# Altium PCB Gateway.PcbDoc
Units mil, origin at the board's own origin, x right, y up, seen from the top; angles counter-clockwise.
Board outline 3560 x 2715 mil, 2 copper layers (Top Layer, Bottom Layer); 93 components, 69 nets, 319 pads, 83 vias.
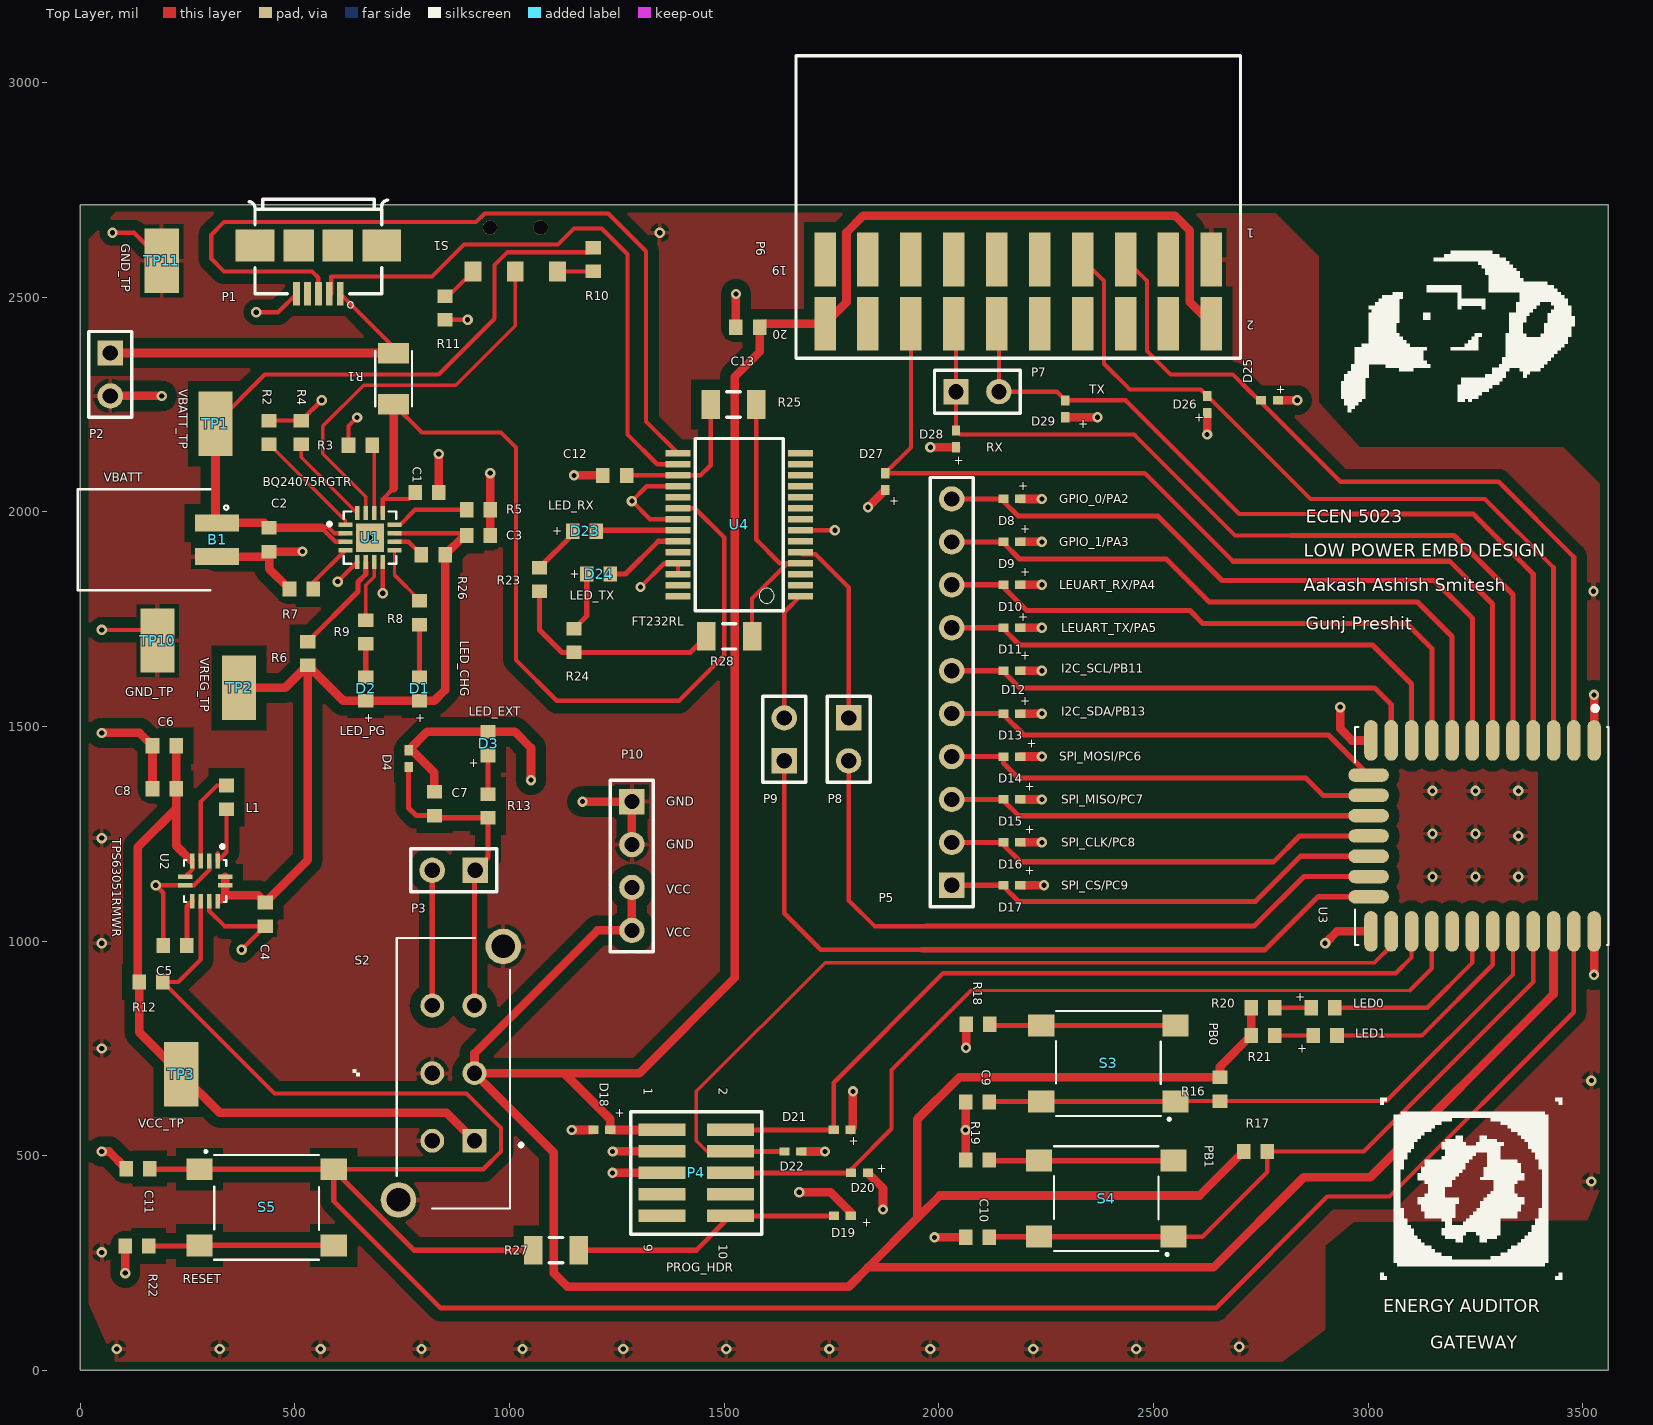
[diagram p0: Top Layer view]
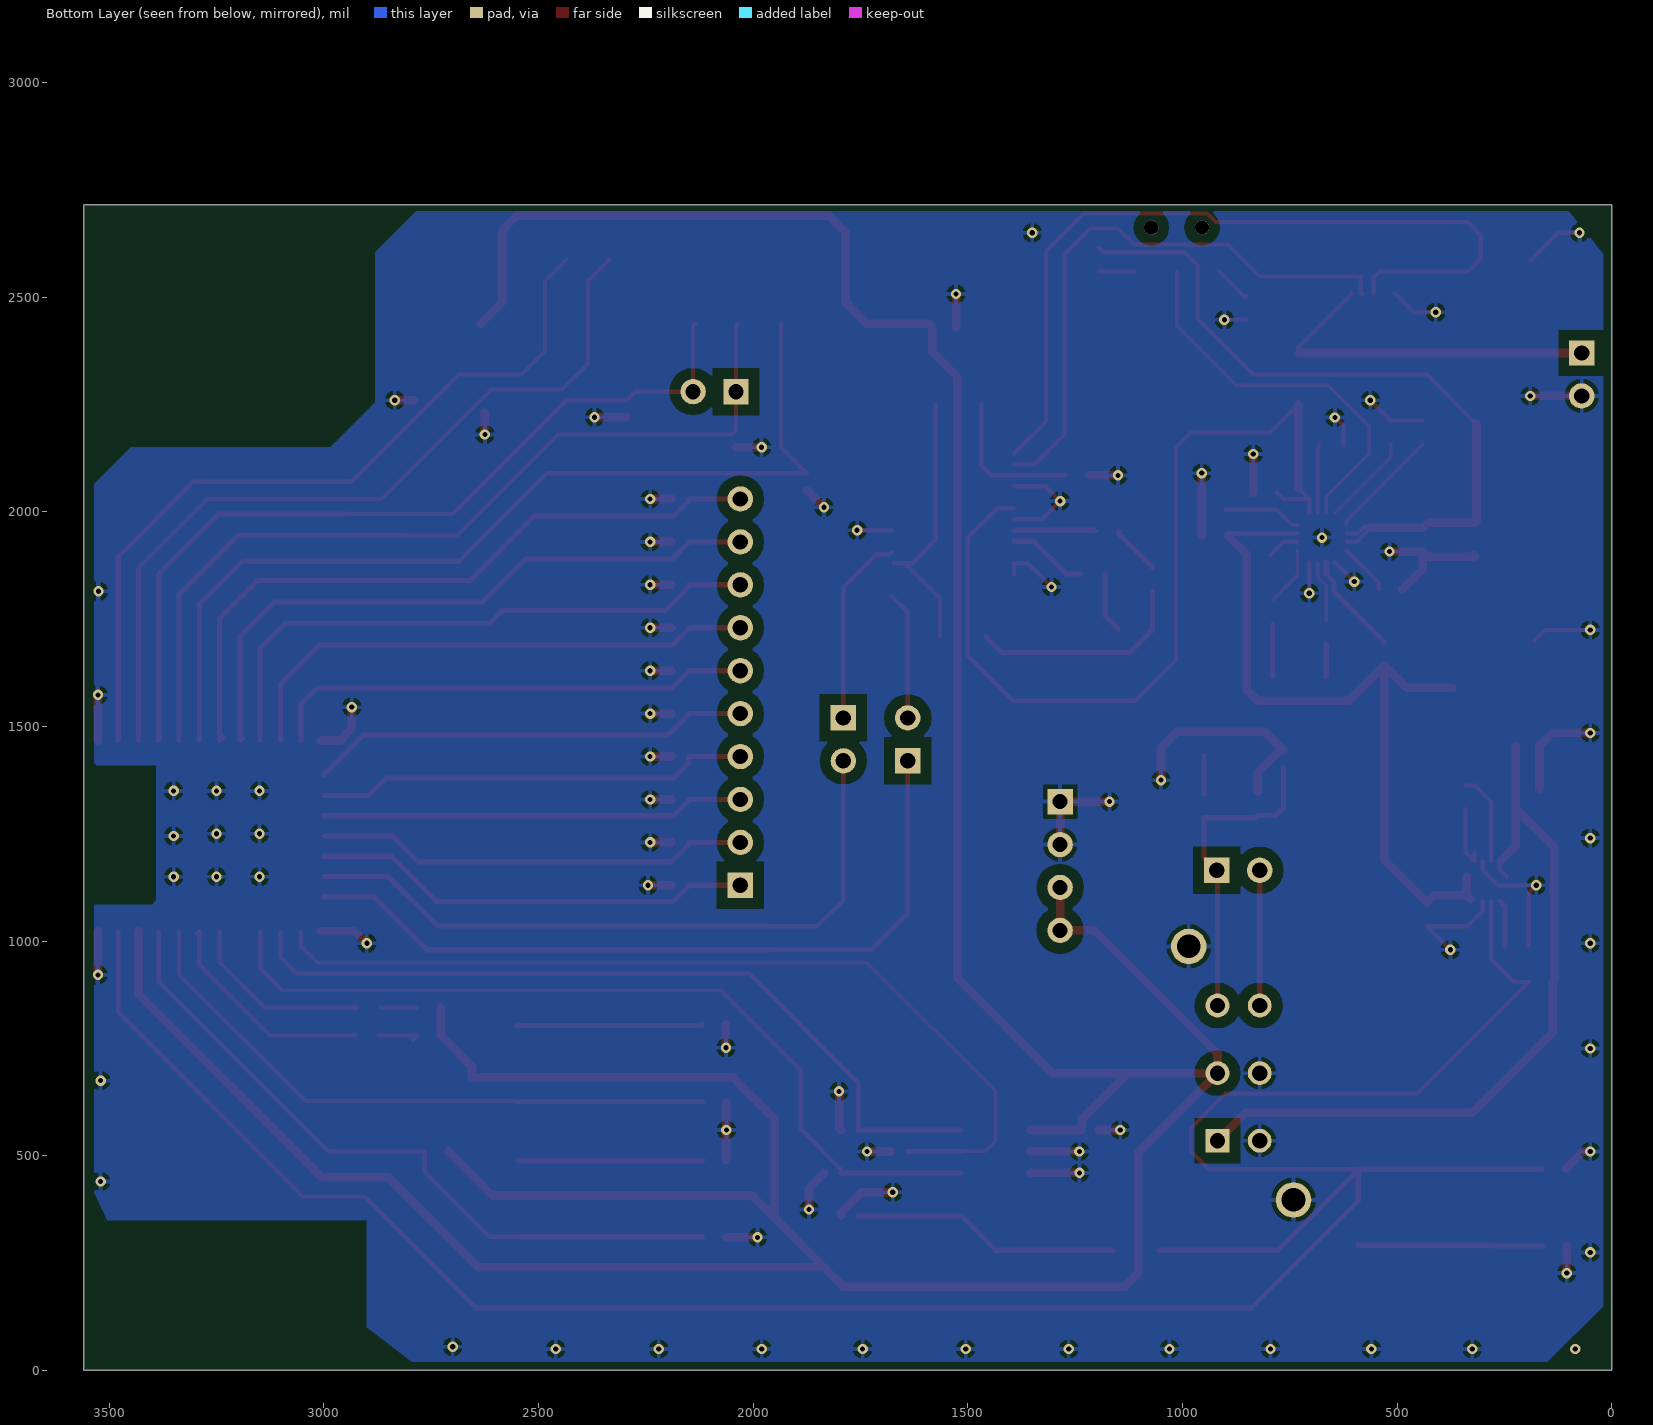
[diagram p1: Bottom Layer view, seen from below]

## Layer stack, top to bottom
Top Solder: solder mask 0.4, Solder Resist, Dk 3.5
Top Layer: signal copper 1.4
Dielectric 1: dielectric 12.6, FR-4, Dk 4.8
Bottom Layer: signal copper 1.4
Bottom Solder: solder mask 0.4, Solder Resist, Dk 3.5

## Board outline
0,0 3560,0 3560,2715 0,2715

## Design rules (kind name [scope] priority, off if disabled: settings)
Clearance [All] p1: gap=10 ignorepadtopadclearanceinfootprint=TRUE except(0: Arc-Hole Track-Hole SMDPad-Hole THPad-Hole Via-Hole Fill-Hole Poly-Hole Region-Hole Text-Hole; 8: Arc-SMDPad Track-Track Track-SMDPad SMDPad-SMDPad; 20: Arc-Via Track-Via SMDPad-Via THPad-Via Via-Via; 25: Arc-Poly Track-Poly SMDPad-Poly THPad-Poly Via-Poly Fill-Poly Poly-Poly)
PolygonConnect [All] p1: connectstyle=Relief reliefconductorwidth=10 reliefentries=4 polygonreliefangle="90 Angle" airgapwidth=10
RoutingVias [All] p1: holewidth=14 width=28 viastyle="Through Hole" minholewidth=10 minwidth=20 maxholewidth=12 maxwidth=24
SolderMaskExpansion [All] p1: expansion=4
Width Width_PWR [(InNet('GND') OR InNet('VREG') OR InNet('VREGOUT') OR InNet('VCC') OR InNet('VCC_IO') OR InNet('V_BATT') OR InNet('V_USB') OR InNet('V_RAW'))] p1: maxlimit=20 minlimit=10 preferedwidth=20
Width [All] p2: maxlimit=12 minlimit=8 preferedwidth=10
30 further rules are at their usual default settings.

## Classes and differential pairs
component class Gecko_IO: C9 C10 C13 D8 D9 D10 D11 D12 D13 D14 D15 D16 D17 D18 D19 D20 D21 D22 D25 D26 D27 D28 D29 LED0 LED1 P4 P5 P6 P10 R16 R17 R18 R19 R20 R21 R27 S3 S4
component class Gecko: C11 P7 R22 S5 TP11 U3
component class PMIC: B1 C1 C2 C3 D1 D2 P1 P2 R1 R2 R3 R4 R5 R6 R7 R8 R9 R10 R11 R26 S1 TP1 TP2 U1
component class Regulator: C4 C5 C6 C7 C8 D3 D4 L1 P3 R12 R13 S2 TP3 TP10 U2
component class UART_USB: C12 D23 D24 P8 P9 R23 R24 R25 R28 U4

## Components (designator, comment, footprint, x,y, rotation, side; value= is the part's Value field where it differs from the comment)
B1 "VBATT" S2B-PH-SM4-TB(LF)(SN) 240,1935 r0 top
C1 "CL10B105KP8NNNC" 1608[0603] 807.56,2045 r180 top value=1uF
C2 "CL10A226MPCNUBE" 1608[0603] 440,1935 r270 top value=22uF
C3 "CL10B105KP8NNNC" 1608[0603] 927.56,1945 r180 top value=1uF
C4 "CL10A226MPCNUBE" 1608[0603] 430.87,1062.44 r90 top value=22uF
C5 "C0603C132J3GAC7867" 1608[0603] 220.87,990 r0 top value=1.3nF
C6 "CL10A226MPCNUBE" 1608[0603] 195.87,1455 r0 top value=22uF
C7 "CL10B105KP8NNNC" 1608[0603] 825,1320 r270 top value=1uF
C8 "CL10A226MPCNUBE" 1608[0603] 195.87,1355 r0 top value=22uF
C9 "06035C102JAT2A" 1608[0603] 2090,625 r0 top value=1nF
C10 "06035C102JAT2A" 1608[0603] 2090,310 r0 top value=1nF
C11 "CL10F104ZO8NNNC" 1608[0603] 134.88,470 r180 top value=100nF
C12 "CL10F104ZO8NNNC" 1608[0603] 1245,2085 r180 top value=100nF
C13 "CL10A226MPCNUBE" 1608[0603] 1555,2430 r180 top value=22uF
D1 "LED_CHG" 1608[0603] 790,1587.44 r90 top
D2 "LED_PG" 1608[0603] 665,1587.44 r90 top
D3 "LED_EXT" 1608[0603] 950,1460 r90 top
D4 "CZRQR3V3B-HF" 0402 765,1425 r270 top
D8 "CZRQR3V3B-HF" 0402 2170,2030 r180 top
D9 "CZRQR3V3B-HF" 0402 2170,1930 r180 top
D10 "CZRQR3V3B-HF" 0402 2170,1830 r180 top
D11 "CZRQR3V3B-HF" 0402 2170,1730 r180 top
D12 "CZRQR3V3B-HF" 0402 2170,1630 r180 top
D13 "CZRQR3V3B-HF" 0402 2170,1530 r180 top
D14 "CZRQR3V3B-HF" 0402 2170,1430 r180 top
D15 "CZRQR3V3B-HF" 0402 2170,1330 r180 top
D16 "CZRQR3V3B-HF" 0402 2170,1230 r180 top
D17 "CZRQR3V3B-HF" 0402 2170,1130 r180 top
D18 "CZRQR3V3B-HF" 0402 1215,560.12 r0 top
D19 "CZRQR3V3B-HF" 0402 1775.32,360.12 r180 top
D20 "CZRQR3V3B-HF" 0402 1815,460 r180 top
D21 "CZRQR3V3B-HF" 0402 1660,510 r180 top
D22 "CZRQR3V3B-HF" 0402 1775,560.12 r180 top
D23 "LED_RX" 1608[0603] 1175,1955 r0 top
D24 "LED_TX" 1608[0603] 1207.56,1855 r0 top
D25 "CZRQR3V3B-HF" 0402 2770.32,2260 r180 top
D26 "CZRQR3V3B-HF" 0402 2625,2250.31 r90 top
D27 "CZRQR3V3B-HF" 0402 1875,2070.31 r90 top
D28 "CZRQR3V3B-HF" 0402 2040,2170 r90 top
D29 "CZRQR3V3B-HF" 0402 2295,2240 r90 top
L1 "LQM18PN1R5MFHD" 1608[0603] 340.87,1335 r270 top value=1.5uH
LED0 "LED0" 1608[0603] 2895,845 r0 top (schematic designator D6)
LED1 "LED1" 1608[0603] 2900,780 r0 top (schematic designator D7)
P1 "10104111-0001LF" FRAMATOME_10104111-0001LF 554.72,2620 r180 top
P2 "Manufacturer Part Number" HDR1X2 70,2370 r270 top
P3 "Manufacturer Part Number" HDR1X2 920,1165 r180 top
P4 "PROG_HDR" SAMTEC-FTSH-105-01-X-DV 1435,460.12 r270 top
P5 "Manufacturer Part Number" HDR1X10 2030,1130 r90 top
P6 "TSM-110-01-L-DH-A-P-TR" SAMTEC-TSM-110-01-X-DH 2185,2765 r180 top
P7 "Header 2" HDR1X2 2040,2280 r0 top
P8 "Header 2" HDR1X2 1790,1520 r270 top
P9 "Header 2" HDR1X2 1640,1420 r90 top
P10 "Header 4" HDR1X4 1285,1325 r270 top
R1 "PTC FUSE" RESC3216X125N 730,2310 r270 top
R2 "MCT06030C1002FP500" 1608[0603] 440,2185 r270 top value=10K
R3 "MCT0603MZ0000ZP500" 1608[0603] 652.44,2155 r0 top value=0R
R4 "ERJ-3EKF2201V" 1608[0603] 515,2185 r270 top value=2.2K
R5 "ERJ-3GEYJ332V" 1608[0603] 927.56,2005 r180 top value=3.3K
R6 "MCT06030C1002FP500" 1608[0603] 530,1670 r270 top value=10K
R7 "RG1608P-104-B-T5" 1608[0603] 515,1820 r0 top value=100K
R8 "MCT06030C1001FP500" 1608[0603] 790,1765 r270 top value=1K
R9 "ERJ-3GEYJ332V" 1608[0603] 665,1720 r270 top value=3.3K
R10 "RG1608P-104-B-T5" 1608[0603] 1195,2587.56 r90 top value=100K
R11 "MCT0603MZ0000ZP500" 1608[0603] 850,2475 r90 top value=0R
R12 "RG1608P-104-B-T5" 1608[0603] 165,905 r180 top value=100K
R13 "ERJ-3GEYJ332V" 1608[0603] 950,1315 r270 top value=3.3K
R16 "RC1608J105CS" 1608[0603] 2655,655 r90 top value=1M
R17 "RC1608J105CS" 1608[0603] 2737.56,510 r180 top value=1M
R18 "CRCW0603100RJNEAC" 1608[0603] 2091.02,806.42 r0 top value=100R
R19 "CRCW0603100RJNEAC" 1608[0603] 2090,490 r0 top value=100R
R20 "ERJ-3GEYJ332V" 1608[0603] 2755,845 r180 top value=3.3K
R21 "ERJ-3GEYJ332V" 1608[0603] 2755,780 r180 top value=3.3K
R22 "CRCW0603100RJNEAC" 1608[0603] 132.44,290 r0 top value=100
R23 "MCT06030C1001FP500" 1608[0603] 1070,1842.56 r270 top value=1K
R24 "MCT06030C1001FP500" 1608[0603] 1150,1700 r270 top value=1K
R25 "MCT0603MZ0000ZP500" C1206 1521.85,2250 r0 top value=0R
R26 "MCT0603MZ0000ZP500" 1608[0603] 822.44,1900 r180 top value=0R
R27 "MCT0603MZ0000ZP500" C1206 1108.15,280 r0 top value=0R
R28 "MCT0603MZ0000ZP500" C1206 1511.85,1710 r0 top value=0R
S1 "AYZ0102AGRLC" SW_AYZ0102AGRLC 1013.43,2611.18 r180 top
S2 "1825289-1" SW_1825289-1_1825289-1(Primary) 869.21,692.48 r90 top
S3 "PB0" 430182043816 2395,715 r180 top
S4 "PB1" 430182043816 2390,400 r180 top
S5 "RESET" 430182043816 434.21,380 r0 top
TP1 "VBATT_TP" TP380X203 315,2205 r270 top
TP2 "VREG_TP" TP380X203 370,1590 r270 top
TP3 "VCC_TP" TP380X203 235,690 r90 top
TP10 "GND_TP" TP380X203 180,1700 r90 top
TP11 "GND_TP" TP380X203 190,2585 r90 top
U1 "BQ24075RGTR" QFN50P300X300X100-17N 675,1940 r0 top
U2 "TPS63051RMWR" QFN50P250X250X100-12N 290.87,1140 r270 top
U3 "BGM13P22F512GA-V2" MODULE_BGM13P22F512GA-V2 3265,1245 r270 top
U4 "FT232RL" SOP65P780X200-28N 1535,1970 r180 top

## Footprints (in the part's own frame and the unit in brackets; to place one, negate y for a bottom-side part, rotate by r counter-clockwise, add the part's x,y. Pads: shape width x height; smd on the part's side, far side on the other; paste and mask are expansions set on the pad)
0402 [mm] "Chip Capacitor, Body 1.0x0.5mm, IPC High Density"
  rect 0.6x0.5 smd: 1(-0.5,0) 2(0.5,0)
  body extent -0.55,-0.3 0.55,0.3, height 1.3
1608[0603] [mm] "Chip Capacitor, Body 1.6x0.8mm, IPC High Density"
  rect 0.8x0.9 smd: 1(-0.7,0) 2(0.7,0)
  body extent -0.87,-0.48 0.87,0.48, height 1.3
430182043816 [mm]
  rect 1.55x1.3 smd: 1(-3.975,2.25) 2(-3.975,-2.25) 3(3.975,2.25) 4(3.975,-2.25)
  silkscreen extent -3.65,-3.1 3.1,3.35
C1206 [mm] "Chip Capacitor, Body 3.2x1.6mm, IPC High Density"
  rect 1.1x1.7 smd: 1(-1.35,0) 2(1.35,0)
  silkscreen extent -0.4,-0.75 0.4,0.75, body extent -1.7,-0.9 1.7,0.9, height 1.3
FRAMATOME_10104111-0001LF [mm]
  rect 0.4x1.4 smd: 1(-1.3,2.85) 2(-0.65,2.85) 3(0,2.85) 4(0.65,2.85) 5(1.3,2.85)
  rect 2.3x1.9 smd: 6(-3.75,0) 9(3.75,0)
  rect 1.8x1.9 smd: 7(-1.15,0) 8(1.15,0)
  silkscreen extent -4.1,-2.75 4.1,3.68
HDR1X2 [mm] "Connector; Header; 2 Position"
  rect 1.5x1.5 hole 0.9: 1(0,0)
  round 1.5 hole 0.9: 2(2.54,0)
  silkscreen extent -1.27,-1.27 3.81,1.27
HDR1X4 [mm] "Connector; Header; 4 Position"
  rect 1.5x1.5 hole 0.9: 1(0,0)
  round 1.5 hole 0.9: 2(2.54,0) 3(5.08,0) 4(7.62,0)
  silkscreen extent -1.27,-1.27 8.89,1.27
HDR1X10 [mm] "Connector; Header; 10 Position"
  rect 1.5x1.5 hole 0.9: 1(0,0)
  round 1.5 hole 0.9: 2(2.54,0) 3(5.08,0) 4(7.62,0) 5(10.16,0) 6(12.7,0) 7(15.24,0) 8(17.78,0) 9(20.32,0) 10(22.86,0)
  silkscreen extent -1.27,-1.27 24.13,1.27
MODULE_BGM13P22F512GA-V2 [mm]
  oval 2.4x0.8 smd: 1(-5.65,6.64) 2(-5.65,5.44) 3(-5.65,4.24) 4(-5.65,3.04) 5(-5.65,1.84) 6(-5.65,0.64) 7(-5.65,-0.56) 8(-5.65,-1.76) 9(-5.65,-2.96) 10(-5.65,-4.16) 11(-5.65,-5.36) 12(-5.65,-6.56) 20(5.65,-6.56) 21(5.65,-5.36) 22(5.65,-4.16) 23(5.65,-2.96) 24(5.65,-1.76) 25(5.65,-0.56) 26(5.65,0.64) 27(5.65,1.84) 28(5.65,3.04) 29(5.65,4.24) 30(5.65,5.44) 31(5.65,6.64)
  oval 0.8x2.4 smd: 13(-3.6,-6.7) 14(-2.4,-6.7) 15(-1.2,-6.7) 16(0,-6.7) 17(1.2,-6.7) 18(2.4,-6.7) 19(3.6,-6.7)
  silkscreen extent -7.69,-7.5 6.45,7.5
QFN50P250X250X100-12N [mm]
  rect 0.86x0.27 smd: 1(-1.185,0.75) 2(-1.185,0.25) 3(-1.185,-0.25) 4(-1.185,-0.75) 7(1.185,-0.75) 8(1.185,-0.25) 9(1.185,0.25) 10(1.185,0.75)
  rect 0.27x0.86 smd: 5(-0.25,-1.185) 6(0.25,-1.185) 11(0.25,1.185) 12(-0.25,1.185)
  silkscreen extent -2.14,-1.25 1.25,1.25
QFN50P300X300X100-17N [mm]
  rect 0.82x0.26 smd: 1(-1.45,0.75) 2(-1.45,0.25) 3(-1.45,-0.25) 4(-1.45,-0.75) 9(1.45,-0.75) 10(1.45,-0.25) 11(1.45,0.25) 12(1.45,0.75)
  rect 0.26x0.82 smd: 5(-0.75,-1.45) 6(-0.25,-1.45) 7(0.25,-1.45) 8(0.75,-1.45) 13(0.75,1.45) 14(0.25,1.45) 15(-0.25,1.45) 16(-0.75,1.45)
  rect 1.68x1.68 smd: 17(0,0)
  silkscreen extent -2.5,-1.55 1.55,1.55
RESC3216X125N [mm]
  rect 1.2x1.82 smd: 1(-1.505,0) 2(1.505,0)
  silkscreen extent -1.63,-1.09 1.63,1.09
S2B-PH-SM4-TB(LF)(SN) [mm]
  rect 2.6x1 smd: 1(2,1) 2(2,-1)
  silkscreen extent -6.25,-3 2.67,3
SAMTEC-FTSH-105-01-X-DV [mm]
  rect 0.74x2.79 smd: 1(-2.54,-2.032) 2(-2.54,2.032) 3(-1.27,-2.032) 4(-1.27,2.032) 5(0,-2.032) 6(0,2.032) 7(1.27,-2.032) 8(1.27,2.032) 9(2.54,-2.032) 10(2.54,2.032)
  silkscreen extent -3.63,-3.88 3.63,3.88
SAMTEC-TSM-110-01-X-DH [mm]
  rect 1.27x3.18 smd: 1(-11.43,4.496) 2(-11.43,8.306) 3(-8.89,4.496) 4(-8.89,8.306) 5(-6.35,4.496) 6(-6.35,8.306) 7(-3.81,4.496) 8(-3.81,8.306) 9(-1.27,4.496) 10(-1.27,8.306) 11(1.27,4.496) 12(1.27,8.306) 13(3.81,4.496) 14(3.81,8.306) 15(6.35,4.496) 16(6.35,8.306) 17(8.89,4.496) 18(8.89,8.306) 19(11.43,4.496) 20(11.43,8.306)
  silkscreen extent -13.15,-7.56 13.15,10.35
SOP65P780X200-28N [mm]
  rect 1.5x0.4 smd: 1(-3.625,4.225) 2(-3.625,3.575) 3(-3.625,2.925) 4(-3.625,2.275) 5(-3.625,1.625) 6(-3.625,0.975) 7(-3.625,0.325) 8(-3.625,-0.325) 9(-3.625,-0.975) 10(-3.625,-1.625) 11(-3.625,-2.275) 12(-3.625,-2.925) 13(-3.625,-3.575) 14(-3.625,-4.225) 15(3.625,-4.225) 16(3.625,-3.575) 17(3.625,-2.925) 18(3.625,-2.275) 19(3.625,-1.625) 20(3.625,-0.975) 21(3.625,-0.325) 22(3.625,0.325) 23(3.625,0.975) 24(3.625,1.625) 25(3.625,2.275) 26(3.625,2.925) 27(3.625,3.575) 28(3.625,4.225)
  silkscreen extent -2.6,-5.1 2.6,5.1
SW_1825289-1_1825289-1(Primary) [mm]
  rect 1.408x1.408 hole 0.9: 1(-4,-1.25)
  round 1.408 hole 0.9: 2(0,-1.25) 3(4,-1.25) 4(-4,1.25) 5(0,1.25) 6(4,1.25)
  round 2.1 hole 1.4: S1(-7.5,3.25) S2(7.5,-2.95)
  silkscreen extent -8,-4.1 8,3.35
SW_AYZ0102AGRLC [mm]
  rect 1x1.2 smd: 1(-2.5,1.3) 2(0,1.3) 3(2.5,1.3)
  round 0.85 hole 0.85 unplated: None(-1.5,-1.3) None(1.5,-1.3)
TP380X203 [mm]
  rect 3.8x2.03 smd: 1(0,0)

## Part data
B1: library part S2B-PH-SM4-TB(LF)(SN), "CONN HEADER PH SIDE 2POS 2MM SMD", Digi-Key Part Number=455-1749-1-ND, Manufacturer="JST Sales America Inc.", ComponentLink1Description="Digi-Key URL", ComponentLink1URL=https://www.digikey.com/products/en/connectors-interconnects/rectangular-connectors-headers-male-pins/314?k=S2B-PH-SM4-TB%28LF%29%28SN%29&k=&pkeyword=S2B-PH-SM4-TB%28LF%29%28SN%29&pv7=2&sf=0&quantity=&ColumnSort=0&page=1&pageSize=25, Manufacturer Part Number=S2B-PH-SM4-TB(LF)(SN)
C1 C3 C7: library part "Cap Semi", "CAP CER 1UF 10V X7R 0603", Digi-Key Part Number=1276-1946-1-ND, Manufacturer="Samsung Electro-Mechanics", ComponentLink1Description="Digi-Key Link", ComponentLink1URL=https://www.digikey.com/product-detail/en/samsung-electro-mechanics/CL10B105KP8NNNC/1276-1946-1-ND/3890032, Manufacturer Part Number=CL10B105KP8NNNC
C2 C4 C6 C8 C13: library part Cap, "CAP CER 22UF 10V X5R 0603", Digi-Key Part Number=1276-6504-1-ND, Manufacturer="Samsung Electro-Mechanics", ComponentLink1Description="Digi-Key Link", ComponentLink1URL=https://www.digikey.com/product-detail/en/samsung-electro-mechanics/CL10A226MPCNUBE/1276-6504-1-ND/5961363, LatestRevisionDate=17-Jul-2002, LatestRevisionNote="Re-released for DXP Platform.", Manufacturer Part Number=CL10A226MPCNUBE, PackageDescription="Radial Cap, Thru-Hole; 2 Leads; 0.3 in Pin Spacing", PackageReference=RAD-0.3, Published=8-Jun-2000, Publisher="Altium Limited"
C5: library part Cap, "CAP CER 1300PF 25V C0G/NP0 0603", Digi-Key Part Number=399-14953-1-ND, Manufacturer=KEMET, ComponentLink1Description="Digi-Key Link", ComponentLink1URL=https://www.digikey.com/product-detail/en/kemet/C0603C132J3GAC7867/399-14953-1-ND/7382502, LatestRevisionDate=17-Jul-2002, LatestRevisionNote="Re-released for DXP Platform.", Manufacturer Part Number=C0603C132J3GAC7867, PackageDescription="Radial Cap, Thru-Hole; 2 Leads; 0.3 in Pin Spacing", PackageReference=RAD-0.3, Published=8-Jun-2000, Publisher="Altium Limited"
C9 C10: library part Cap, "CAP CER 1000PF 50V X7R 0603", Digi-Key Part Number=478-5006-1-ND, Manufacturer="AVX Corporation", ComponentLink1Description="Digi-Key Link", ComponentLink1URL=https://www.digikey.com/product-detail/en/avx-corporation/06035C102JAT2A/478-5006-1-ND/1888217, LatestRevisionDate=17-Jul-2002, LatestRevisionNote="Re-released for DXP Platform.", Manufacturer Part Number=06035C102JAT2A, PackageDescription="Radial Cap, Thru-Hole; 2 Leads; 0.3 in Pin Spacing", PackageReference=RAD-0.3, Published=8-Jun-2000, Publisher="Altium Limited"
C11 C12: library part Cap, "CAP CER 0.1UF 16V X7R 0603", Digi-Key Part Number=1276-1258-1-ND, Manufacturer="Samsung Electro-Mechanics", ComponentLink1Description="Digi-Key Link", ComponentLink1URL=https://www.digikey.com/product-detail/en/samsung-electro-mechanics/CL10F104ZO8NNNC/1276-1258-1-ND/3889344, LatestRevisionDate=17-Jul-2002, LatestRevisionNote="Re-released for DXP Platform.", Manufacturer Part Number=CL10F104ZO8NNNC, PackageDescription="Radial Cap, Thru-Hole; 2 Leads; 0.3 in Pin Spacing", PackageReference=RAD-0.3, Published=8-Jun-2000, Publisher="Altium Limited"
D1: library part LED2, "Blue 470nm LED Indication - Discrete 2.85V 0603 (1608 Metric)", Digi-Key Part Number=475-2816-1-ND, Manufacturer="OSRAM Opto Semiconductors Inc.", Manufacturer Part Number="LB Q39G-L2OO-35-1", ComponentLink1Description="Digi-Key Link", ComponentLink1URL=https://www.digikey.com/product-detail/en/osram-opto-semiconductors-inc/LB-Q39G-L2OO-35-1/475-2816-1-ND/2176355
D2 D3 LED0 LED1: library part LED2, "LED GREEN DIFFUSED 0603 SMD", Digi-Key Part Number=475-3118-1-ND, Manufacturer="OSRAM Opto Semiconductors Inc.", Manufacturer Part Number="LG L29K-F2J1-24-Z", ComponentLink1Description="Digi-Key Link", ComponentLink1URL=https://www.digikey.com/product-detail/en/osram-opto-semiconductors-inc/LG-L29K-F2J1-24-Z/475-3118-1-ND/4899549
D4 D8 D9 D10 D11 D12 D13 D14 D15 D16 D17 D18 D19 D20 D21 D22 D25 D26 D27 D28 D29: library part "D Zener", "DIODE ZENER 3.3V 125MW 0402", Digi-Key Part Number=641-1682-1-ND, Manufacturer="Comchip Technology", ComponentLink1Description="Digi-Key Link", ComponentLink1URL=https://www.digikey.com/product-detail/en/comchip-technology/CZRQR3V3B-HF/641-1682-1-ND/5147319, Manufacturer Part Number=CZRQR3V3B-HF
D23: library part LED2, "LED RED DIFFUSED 0603 SMD", Digi-Key Part Number=475-1195-1-ND, Manufacturer="OSRAM Opto Semiconductors Inc.", Manufacturer Part Number="LS L29K-H1J2-1-Z", ComponentLink1Description="Digi-Key Link", ComponentLink1URL=https://www.digikey.com/product-detail/en/osram-opto-semiconductors-inc/LG-L29K-F2J1-24-Z/475-3118-1-ND/4899549
D24: library part LED2, "LED YELLOW DIFFUSED 0603 SMD", Digi-Key Part Number=475-1196-1-ND, Manufacturer="OSRAM Opto Semiconductors Inc.", Manufacturer Part Number="LY L29K-H1K2-26-Z", ComponentLink1Description="Digi-Key Link", ComponentLink1URL=https://www.digikey.com/product-detail/en/osram-opto-semiconductors-inc/LY-L29K-H1K2-26-Z/475-1196-1-ND/810357
L1: library part Inductor, "FIXED IND 1.5UH 1.1A 213 MOHM", Digi-Key Part Number=490-15637-1-ND, Manufacturer="Murata Electronics North America", Code_IEC=1005, Code_JEITA=0402, ComponentLink1Description="Digi-Key Link", ComponentLink1URL=https://www.digikey.com/product-detail/en/murata-electronics-north-america/LQM18PN1R5MFHD/490-15637-1-ND/6800302, LatestRevisionDate=29-May-2009, LatestRevisionNote="IPC-7351 Footprint Added.", Manufacturer Part Number=LQM18PN1R5MFHD, PackageDescription="Chip Inductor", PackageReference=0402-A, Published=8-Jun-2000, Publisher="Altium Limited"
P1: "Micro Usb, 2.0 Type Ab, Receptacle, Th", Digi-Key Part Number=609-4053-1-ND, Manufacturer="Amphenol FCI", ComponentLink1Description="Digi-Key Link", ComponentLink1URL=https://www.digikey.com/product-detail/en/amphenol-fci/10104111-0001LF/609-4053-1-ND/2350359?utm_source=snapeda&utm_medium=aggregator&utm_campaign=symbol, Manufacturer Part Number=10104111-0001LF
P2 P3: library part "Header 2", "Header, 2-Pin"
  P3: LatestRevisionDate=17-Jul-2002, LatestRevisionNote="Re-released for DXP Platform.", Publisher="Altium Limited"
P4: library part SAMTEC-FTSH-105-01-X-DV, ".050\" X .050 TERMINAL STRIP", Digi-Key Part Number=SAM13160CT-ND, Manufacturer=Samtec, Manufacturer Part Number=FTSH-105-01-F-DV-K-TR, ComponentLink1Description="Digi-Key Link", ComponentLink1URL=https://www.digikey.com/products/en/connectors-interconnects/rectangular-connectors-headers-male-pins/314?k=FTSH-105-01-F-DV-K-TR&k=&pkeyword=FTSH-105-01-F-DV-K-TR&pv7=2&sf=0&quantity=&ColumnSort=0&page=1&pageSize=25
P5: library part "Header 10", "Header, 10-Pin", LatestRevisionDate=17-Jul-2002, LatestRevisionNote="Re-released for DXP Platform.", Publisher="Altium Limited"
P6: library part SAMTEC-TSM-110-01-X-DH, ".025 SQ. TERMINAL STRIPS", Digi-Key Part Number=SAM14883CT-ND, Manufacturer="Samtec Inc.", ComponentLink1Description="Digi-Key Link", ComponentLink1URL=https://www.digikey.com/product-detail/en/samtec-inc/TSM-110-01-L-DH-A-P-TR/SAM14883CT-ND/9595175, Manufacturer Part Number=TSM-110-01-L-DH-A-P-TR
P7 P8 P9: "Header, 2-Pin", LatestRevisionDate=17-Jul-2002, LatestRevisionNote="Re-released for DXP Platform.", Publisher="Altium Limited"
P10: "Header, 4-Pin", LatestRevisionDate=17-Jul-2002, LatestRevisionNote="Re-released for DXP Platform.", Publisher="Altium Limited"
R1: library part 0ZCA0075FF2G, "PTC RESET FUSE 6V 500MA 1206", Digi-Key Part Number=F2112CT-ND, Manufacturer="Bel Fuse", Manufacturer Part Number="Littelfuse Inc.", Package="1206 Bel Fuse", Availability=Available, ComponentLink1Description="Digi-Key Link", ComponentLink1URL=https://www.digikey.com/product-detail/en/littelfuse-inc/1206L050YR/F2112CT-ND/455721, MP=0ZCA0075FF2G, Price=None, SnapEDA_Link=https://www.snapeda.com/parts/0ZCA0075FF2G/Bel%20Fuse%20Inc./view-part/?ref=snap
R2 R6: library part Res3, "RES SMD 10K OHM 1% 1/8W 0603", Digi-Key Part Number=MCT0603-10.0K-CFCT-ND, Manufacturer="Vishay Beyschlag", ComponentLink1Description="Digi-Key URL", ComponentLink1URL=https://www.digikey.com/products/en?keywords=MCT0603-10.0K-CFCT-ND, Manufacturer Part Number=MCT06030C1002FP500
R3 R11 R25 R26 R27 R28: library part Res3, "RES 0 OHM JUMPER 1/8W 0603", Digi-Key Part Number=749-1745-1-ND, Manufacturer="Vishay Beyschlag", ComponentLink1URL=https://www.digikey.com/product-detail/en/vishay-beyschlag/MCT0603MZ0000ZP500/749-1745-1-ND/7348053, Manufacturer Part Number=MCT0603MZ0000ZP500
  R3 R26 R27: ComponentLink1Description="Digi-Key Link", LatestRevisionDate=29-May-2009, LatestRevisionNote="IPC-7351 Footprint Added.", PackageDescription="Chip Resistor", PackageReference=J1-0603, Published=8-Jun-2000, Publisher="Altium Limited"
  R11: ComponentLink2Description="Digi-Key Link", LatestRevisionDate=29-May-2009, LatestRevisionNote="IPC-7351 Footprint Added.", PackageDescription="Chip Resistor", PackageReference=J1-0603, Published=8-Jun-2000, Publisher="Altium Limited"
  R25 R28: ComponentLink1Description="Digi-Key Link"
R4: library part Res3, "RES SMD 2.2K OHM 1% 1/10W 0603", Digi-Key Part Number=P2.20KHCT-ND, Manufacturer="Panasonic Electronic Components", ComponentLink1Description="Digi-Key URL", ComponentLink1URL=https://www.digikey.com/product-detail/en/panasonic-electronic-components/ERJ-3EKF2201V/P2.20KHCT-ND/1746742, Manufacturer Part Number=ERJ-3EKF2201V
R5 R9 R13 R20 R21: library part Res3, "RES SMD 3.3K OHM 5% 1/10W 0603", Digi-Key Part Number=P3.3KGCT-ND, Manufacturer="Panasonic Electronic Components", ComponentLink1Description="Digi-Key URL", ComponentLink1URL=https://www.digikey.com/product-detail/en/panasonic-electronic-components/ERJ-3GEYJ332V/P3.3KGCT-ND/135146, Manufacturer Part Number=ERJ-3GEYJ332V
R7 R10 R12: library part Res3, "RES SMD 100K OHM 0.1% 1/10W 0603", Digi-Key Part Number=RG16P100KBCT-ND, Manufacturer=Susumu, Manufacturer Part Number=RG1608P-104-B-T5
  R7 R10: ComponentLink1Description="Digi-Key URL", ComponentLink1URL=https://www.digikey.com/products/en?keywords=RG16p100kbct-nd
  R12: ComponentLink1Description="Digi-Key Link", ComponentLink1URL=https://www.digikey.com/products/en/resistors/chip-resistor-surface-mount/52?k=RG1608P-104-B-T5&k=&pkeyword=RG1608P-104-B-T5&pv7=2&sf=0&quantity=&ColumnSort=0&page=1&pageSize=25, LatestRevisionDate=29-May-2009, LatestRevisionNote="IPC-7351 Footprint Added.", PackageDescription="Chip Resistor", PackageReference=J1-0603, Published=8-Jun-2000, Publisher="Altium Limited"
R8 R23 R24: library part Res3, "RES SMD 1K OHM 1% 1/8W 0603", Digi-Key Part Number=MCT0603-1.00K-CFCT-ND, Manufacturer="Vishay Beyschlag", ComponentLink1Description="Digi-Key URL", ComponentLink1URL=https://www.digikey.com/product-detail/en/vishay-beyschlag/MCT06030C1001FP500/MCT0603-1.00K-CFCT-ND/2607875, Manufacturer Part Number=MCT06030C1001FP500
R16 R17: library part Res3, "RES SMD 1M OHM 5% 1/10W 0603", Digi-Key Part Number=1276-5134-1-ND, Manufacturer="Samsung Electro-Mechanics", ComponentLink1Description="Digi-Key Link", ComponentLink1URL=https://www.digikey.com/product-detail/en/samsung-electro-mechanics/RC1608J105CS/1276-5134-1-ND/3968106, LatestRevisionDate=29-May-2009, LatestRevisionNote="IPC-7351 Footprint Added.", Manufacturer Part Number=RC1608J105CS, PackageDescription="Chip Resistor", PackageReference=J1-0603, Published=8-Jun-2000, Publisher="Altium Limited"
R18 R19 R22: library part Res3, "RES SMD 100 OHM 5% 1/10W 0603", Digi-Key Part Number=541-4059-1-ND, Manufacturer="Vishay Dale", ComponentLink1Description="Digi-Key Link", ComponentLink1URL=https://www.digikey.com/product-detail/en/vishay-dale/CRCW0603100RJNEAC/541-4059-1-ND/7928742, LatestRevisionDate=29-May-2009, LatestRevisionNote="IPC-7351 Footprint Added.", Manufacturer Part Number=CRCW0603100RJNEAC, PackageDescription="Chip Resistor", PackageReference=J1-0603, Published=8-Jun-2000, Publisher="Altium Limited"
S1: "SWITCH SLIDE SPDT 100MA 12V", Digi-Key Part Number=401-2012-1-ND, Manufacturer=C&K, ComponentLink1Description="Digi-Key Link", ComponentLink1URL=https://www.digikey.com/products/en/switches/slide-switches/213?k=AYZ0102AGRLC&k=&pkeyword=AYZ0102AGRLC&pv7=2&sf=0&quantity=&ColumnSort=0&page=1&pageSize=25, Manufacturer Part Number=AYZ0102AGRLC
S2: "MHS22204=DPDT SL SW VERT AG", Digi-Key Part Number=450-1572-ND, Manufacturer="TE Connectivity", ComponentLink1Description="Digi-Key Link", ComponentLink1URL=https://www.digikey.com/products/en?keywords=MHS22204, Manufacturer Part Number=1825289-1
S3 S4 S5: library part 430182043816, "SWITCH TACTILE SPST-NO 0.05A 12V", Digi-Key Part Number=732-7004-1-ND, Manufacturer="Wurth Electronics", ComponentLink1Description="Digi-Key Link", ComponentLink1URL=https://www.digikey.com/products/en/switches/tactile-switches/197?k=430+182+043+816&k=&pkeyword=430+182+043+816&pv7=2&sf=0&quantity=&ColumnSort=0&page=1&pageSize=25, Manufacturer Part Number=430182043816
TP1 TP2 TP3 TP10 TP11: library part 5019, "PC TEST POINT MINIATURE", Digi-Key Part Number=36-5019CT-ND, Manufacturer="Keystone Electronics", Package="2010 Keystone", ComponentLink1Description="Digi-Key Link", ComponentLink1URL=https://www.digikey.com/product-detail/en/keystone-electronics/5019/36-5019CT-ND/3907344?utm_source=snapeda&utm_medium=aggregator&utm_campaign=symbol, Digi-Key_Part_Number=36-5019CT-ND, Manufacturer Part Number=5019, MF=Keystone, MP=5019, SnapEDA_Link=https://www.snapeda.com/parts/5019/Keystone%20Electronics/view-part/?ref=snap
  TP11: Digi-Key_Purchase_URL=https://www.digikey.com/product-detail/en/keystone-electronics/5019/36-5019CT-ND/3907344?utm_source=snapeda&utm_medium=aggregator&utm_campaign=symbol
U1: library part BQ24075RGTT, "IC LI-ION CHARGE MGMT 16-QFN", Digi-Key Part Number=296-38874-1-ND, Manufacturer="Texas Instruments", Package="QFN-16 Texas Instruments", Availability=Available, ComponentLink1Description="Digi Key Link", ComponentLink1URL=https://www.digikey.com/product-detail/en/texas-instruments/BQ24075RGTR/296-38874-1-ND/5142986, Manufacturer Part Number=BQ24075RGTT, Price=None, SnapEDA_Link=https://www.snapeda.com/parts/BQ24075RGTT/Texas%20Instruments/view-part/?ref=snap
U2: "Tiny Single Inductor Buck Boost Converter 12-VQFN -40 to 85", Digi-Key Part Number=296-42650-1-ND, Manufacturer="Texas Instruments", ComponentLink1Description="Digi-Key Link", ComponentLink1URL=https://www.digikey.com/products/en/integrated-circuits-ics/pmic-voltage-regulators-dc-dc-switching-regulators/739?k=TPS63051RMWR&k=&pkeyword=TPS63051RMWR&pv7=2&sf=0&quantity=&ColumnSort=0&page=1&pageSize=25, Manufacturer Part Number=TPS63051RMWR
U3: "EFR32BG13 Bluetooth 5.0 Module, 512kB Flash, +8dbm", Digi-Key Part Number=336-5465-1-ND, Manufacturer="Silicon Labs", Package="Module Silicon Labs", Availability=Available, ComponentLink1Description="Digi-Key Link", ComponentLink1URL=https://www.digikey.com/product-detail/en/silicon-labs/BGM13P32F512GA-V2R/336-5465-1-ND/9324917, Manufacturer Part Number=BGM13P22F512GA-V2, Price=None, SnapEDA_Link=https://www.snapeda.com/parts/BGM13P22F512GA-V2/Silicon%20Labs/view-part/?ref=snap
U4: library part FT232RL-REEL, "USB Bridge, USB to UART USB 2.0 UART Interface 28-SSOP", Digi-Key Part Number=768-1007-1-ND, Manufacturer="FTDI, Future Technology Devices International Ltd", Package="SSOP-28 FTDI", Availability=Available, ComponentLink1Description="Digi-Key Link", ComponentLink1URL=https://www.digikey.com/product-detail/en/ftdi-future-technology-devices-international-ltd/FT232RL-REEL/768-1007-1-ND/1836402, Manufacturer Part Number=FT232RL-REEL, MF=FTDI,, MP=FT232RL-REEL, Price=None, SnapEDA_Link=https://www.snapeda.com/parts/FT232RL-REEL/FTDI%2C%20Future%20Technology%20Devices%20International%20Ltd/view-part/?ref=snap

## Via types
v1: diameter 24, hole 12, Top Layer to Bottom Layer, tented top, 83 vias

## Nets (pads, with @x,y where several pads share a name; then routed paths per layer and width w, separated by ;. In a path a pad name is that pad's centre, name@x,y a point inside that pad or via, vN(x,y) a via of type N, cw(c..) or ccw(c..) an arc to the next point about the centre after c; other vN are vias at no path point)
DEBUG_GPIO0: D8.2 P5.10 U3.7 | length 1627.1
  Top Layer w12: P5.10 D8.2 2150.31,2024.69 2185,1990 2510,1990 2660,1840 3155,1840 3242.95,1752.05 U3.7 U3.7@3235,1475.39
DEBUG_GPIO1: D9.2 P5.9 U3.8 | length 1508.3
  Top Layer w12: P5.9 D9.2 2150.31,1927.92 2188.23,1890 2530,1890 2630,1790 3115,1790 3195.71,1709.29 U3.8 U3.8@3190,1473.15
GND: B1.2 C1.1 C2.2 C3.1 C4.1 C5.1 C6.1 C7.1 C8.1 C9.1 C10.1 C11.2 C12.2 C13.2 D3.2 D4.1 D8.1 D9.1 D10.1 D11.1 D12.1 D13.1 D14.1 D15.1 D16.1 D17.1 D18.1 D19.1 D20.1 D21.1 D22.1 D25.1 D26.1 D27.1 D28.1 D29.1 P1.5 P2.2 P4.3 P4.5 P6.1 P10.1 P10.2 R2.1 R3.1 R4.1 R5.1 R7.1 R11.1 R18.1 R19.1 R22.1 S2.4 S2.5 S2.S1 S2.S2 TP10.1 TP11.1 U1.5 U1.8 U1.17 U2.2 U2.6 U2.9 U3.1 U3.12 U3.20 U3.31 U4.7 U4.18 U4.21 U4.25 U4.26 | length 5923.7
  Top Layer w10: v1(50,1725) 155,1725 TP10.1 ; v1(75,2650) 125,2650 TP11.1 ; C5.1 193.31,1112.87 v1(176.02,1130.16) U2.6 265.16,1130.16 300.71,1165.71 U2.2 ; U2.9 300.71,1070.16 335.99,1034.88 C4.1 v1(375.99,980) ; v1(410,2465) 460.75,2465 P1.5 ; R2.1 R4.1 v1(562.44,2260) ; v1(600,1837.44) U1.5 ; R3.1 624.88,2199.88 v1(645,2220) ; v1(704.53,1810.47) U1.8 ; R11.1 v1(902.44,2447.44) ; v1(1305,1825) 1360.43,1880.43 U4.25 U4.26 ; U4.21 1327.2,1982.8 v1(1285,2025) 1319.57,2059.57 U4.18 ; U4.7 v1(1757.8,1957.2)
  Top Layer w20: v1(50,510) 67.32,510 C11.2 ; v1(50,1485) 138.31,1485 C6.1 C8.1 ; P2.2 v1(190,2270) ; v1(104.88,226.65) R22.1 ; B1.2@323.11,1900 B1.2 428.19,1895.63 C2.2 ; R7.1 440,1867.44 C2.2 ; v1(517.56,1907.44) C2.2 ; C7.1 825,1392.42 772.74,1444.68 D4.1 807.87,1487.56 D3.2 1012.44,1487.56 1050,1450 v1(1050,1375) ; C1.1 v1(835.12,2134.88) ; C3.1 R5.1 v1(955.12,2090.12) ; v1(1145,560) 1145.12,560.12 D18.1 ; v1(1150,2085) C12.2 ; v1(1170,1325) P10.1 P10.2 ; v1(1240,460.12) P4.5 ; v1(1240.12,510.12) P4.3 ; C13.2 v1(1527.44,2507.56) ; v1(1675,415.12) 1747.74,415.12 1795,367.85 D19.1 ; D21.1 v1(1735,510) ; D22.1 1800,565.43 v1(1800,650) ; D20.1 1870,424.68 v1(1870,375) ; v1(1835,2010.63) D27.1 ; v1(1980.32,2150.32) D28.1 ; v1(1990,310) C10.1 ; R19.1 v1(2062.44,560) C9.1 ; v1(2063.46,751.54) R18.1 ; D17.1 v1(2245,1130) ; D16.1 v1(2240,1230) ; D15.1 v1(2240,1330) ; D14.1 v1(2240,1430) ; D13.1 v1(2240,1530) ; D12.1 v1(2240,1630) ; D11.1 v1(2240,1730) ; D10.1 v1(2240,1830) ; D9.1 v1(2240,1930) ; D8.1 v1(2240,2030) ; D29.1 v1(2369.68,2220.32) ; v1(2625,2180) D26.1 ; D25.1 v1(2835,2260) ; v1(2900,995) 2927.56,1022.56 U3.20 ; v1(2935,1545) 2935,1495 2962.56,1467.44 U3.12 ; v1(3526.42,921.42) U3.31 ; U3.1 v1(3526.42,1573.58)
  other v1: 85,50 325,50 560,50 795,50 1030,50 1265,50 1505,50 1745,50 1980,50 2220,50 2460,50 2700,55 50,275 3520,440 3520,675 50,750 50,995 3150,1150 3250,1150 3350,1150 50,1240 3350,1245 3150,1250 3250,1250 3150,1350 3250,1350 3350,1350 3525,1815 675,1940 1350,2650
I2C_SCL: D12.2 P5.6 U3.11 | length 1141.5
  Top Layer w12: P5.6 D12.2 2150.31,1627.92 2188.23,1590 3015,1590 3053.98,1551.02 U3.11
I2C_SDA: D13.2 P5.5 U3.13 | length 1031.8
  Top Layer w12: P5.5 D13.2 2150.31,1527.92 2198.23,1480 2907.95,1480 U3.13
LED0: LED0.2 U3.25 | length 436.4
  Top Layer w10: LED0.2 3137.95,845 3242.95,950 U3.25
LED1: LED1.2 U3.26 | length 515.3
  Top Layer w10: LED1.2 3125.2,780 3290.2,945 U3.26
  Top Layer w12: U3.26 U3.26@3295,1017.76
LEUART_RX: D10.2 P5.8 U3.9 | length 1397.2
  Top Layer w12: P5.8 D10.2 2150.31,1824.69 2205,1770 2585,1770 2615,1740 3090,1740 3148.46,1681.54 U3.9
LEUART_TX: D11.2 P5.7 U3.10 | length 1258.1
  Top Layer w12: P5.7 D11.2 2150.31,1727.92 2188.23,1690 3010,1690 3101.22,1598.78 U3.10
NCP_BTN1: D25.2 P6.5 U3.2 | length 1854.3
  Top Layer w10: P6.5 2485,2537.99 2485,2375 2540,2320 2685,2320 2730,2275 2730.67,2275 2935.67,2070 3304.17,2070 3479.17,1895
  Top Layer w12: U3.2 3479.17,1895
NCP_BTN2: D26.2 P6.7 U3.3 | length 1909.9
  Top Layer w10: P6.7 2385,2537.99 2385,2345 2445,2285 2610,2285 D26.2 2625.67,2270 2865.67,2030 3271.93,2030 3431.93,1870
  Top Layer w12: U3.3 3431.93,1870
NCP_RSTN: D27.2 P6.16 U3.6 | length 2231.8
  Top Layer w10: P6.16 1935,2150 D27.2 2480,2090 2685,1885 ; U3.6@3290,1467.64 U3.6
  Top Layer w12: 2685,1885 3190,1885 3290,1785 U3.6@3290,1467.64
NCP_RX: D28.2 P6.14 P7.1 U3.5 | length 2046.2
  Top Layer w10: P6.14 2040,2432.99 P7.1 D28.2 2049.68,2180 2455,2180 2690,1945 2820,1945
  Top Layer w12: 2820,1945 3200,1945 3337.44,1807.56 U3.5
NCP_TX: D29.2 P6.12 P7.2 U3.4 | length 1968.5
  Top Layer w10: P6.12 2140,2432.99 P7.2 2274.68,2280 D29.2 2435.31,2259.69 2700,1995 2946.45,1995
  Top Layer w12: 2946.45,1995 3245,1995 3384.69,1855.32 U3.4
NetC5_2: C5.2 U2.7 | length 108.6
  Top Layer w12: C5.2 248.43,1080.75 U2.7@261.02,1093.35
NetC7_2: C7.2 D4.2 P3.1 R13.2 S2.3 | length 740.2
  Top Layer w12: D4.2 765,1310 782.56,1292.44 C7.2 830,1287.44 R13.2 950,1195 P3.1 918.43,1163.43 S2.3
NetC12_1: C12.1 R25.1 U4.17 | length 347.3
  Top Layer w10: C12.1 1392.13,2085 U4.17 1445.16,2085.16 1468.7,2108.7 R25.1
NetD1_2: D1.2 R8.2 | length 122.4
  Top Layer w12: D1.2 R8.2
NetD2_2: D2.2 R9.2 | length 77.4
  Top Layer w12: D2.2 R9.2
NetD3_1: D3.1 R13.1 | length 89.9
  Top Layer w12: R13.1 D3.1
NetD6_1: LED0.1 R20.1 | length 84.9
  Top Layer w10: R20.1 LED0.1
NetD7_1: LED1.1 R21.1 | length 104
  Top Layer w10: R21.1@2792.56,770 R21.1 LED1.1
NetD19_2: D19.2 P4.10 R27.2 | length 627.5
  Top Layer w12: R27.2 1434.88,280 P4.10 D19.2
NetD23_1: D23.1 R23.1 | length 117
  Top Layer w12: R23.1 1147.44,1947.56 D23.1
NetD23_2: D23.2 U4.22 | length 190.6
  Top Layer w12: D23.2 1204.76,1957.2 U4.22
NetD24_1: D24.1 R24.1 | length 139.9
  Top Layer w12: R24.1 1180,1757.56 D24.1
NetD24_2: D24.2 U4.23 | length 188.9
  Top Layer w12: D24.2 1270,1855 1346.61,1931.61 U4.23
NetL1_1: L1.1 U2.3 | length 213.8
  Top Layer w10: U2.3 281.02,1325.16 318.43,1362.56 L1.1
NetL1_2: L1.2 U2.1 | length 147
  Top Layer w10: 320.39,1204.41 U2.1 340.87,1207.13 L1.2
NetP3_2: P3.2 S2.6 | length 316.2
  Top Layer w12: S2.6 P3.2 P3.2@820.79,1164.21
NetP8_1: P8.1 U4.5 | length 450.2
  Top Layer w10: U4.5 1682.43,1901.31 1712.63,1901.31 1790,1823.94 P8.1
NetP9_2: P9.2 U4.1 | length 299.3
  Top Layer w10: P9.2 1640,1765.94 U4.1
NetR2_2: R2.2 U1.1 | length 261.6
  Top Layer w8: R2.2 617.91,1979.53 U1.1
NetR3_2: R3.2 U1.14 | length 159.9
  Top Layer w8: R3.2 684.84,2150.16 U1.14
NetR4_2: R4.2 U1.16 | length 214.4
  Top Layer w8: R4.2 515,2127.56 U1.16
NetR5_2: R5.2 U1.12 | length 182.6
  Top Layer w10: U1.12 744.53,1969.53 780,2005 R5.2
NetR6_1: R6.1 U1.6 | length 245
  Top Layer w8: U1.6@662.59,1880.35 U1.6
  Top Layer w12: R6.1 647,1814.56 647,1836.36 665.16,1854.52 U1.6
NetR7_2: R7.2 U1.4 | length 121.7
  Top Layer w10: R7.2 542.56,1835.12 U1.4
NetR8_1: R8.1 U1.9 | length 139.5
  Top Layer w8: U1.9 732.09,1852.91 R8.1@790,1795
NetR9_1: R9.1 U1.7 | length 143.6
  Top Layer w8: R9.1 665,1828.9 684.84,1848.74 U1.7
NetR10_1: R10.1 S1.1 | length 83.1
  Top Layer w10: S1.1 R10.1
NetR11_2: R11.2 S1.3 | length 88.8
  Top Layer w10: R11.2 857.56,2502.56 S1.3
NetR18_2: R18.2 S3.2 S3.4 | length 434.1
  Top Layer w12: R18.2 2121.42,803.58 S3.4 S3.2
NetR19_2: R19.2 S4.2 S4.4 | length 429.5
  Top Layer w12: R19.2 2118.98,488.58 S4.4 S4.2
NetR22_2: R22.2 S5.2 S5.4 | length 431.3
  Top Layer w12: R22.2 276.3,290 S5.2 S5.4
NetR23_2: R23.2 R24.2 R28.1 | length 516
  Top Layer w12: R23.2 1070,1725 1122.56,1672.44 R24.2 1421.14,1672.44 R28.1
NetR26_2: R26.2 U1.10 | length 75.3
  Top Layer w10: U1.10 764.72,1930.16 R26.2
PB0: C9.2 R16.1 S3.1 S3.3 U3.27 | length 1443.2
  Top Layer w10: S3.1 2552.52,627.44 R16.1 3042.44,627.44 3337.44,922.44 U3.27
  Top Layer w12: C9.2 2118.98,626.42 S3.3 S3.1
PB1: C10.2 R17.1 S4.1 S4.3 U3.28 | length 1659.1
  Top Layer w10: S4.1 2613.98,311.42 2765.12,462.56 R17.1 2990,510 3384.69,904.68 U3.28
  Top Layer w12: C10.2 2118.98,311.42 S4.3 S4.1
RESETN: C11.1 R12.1 R27.1 S5.1 S5.3 U2.8 U3.30 | length 6146.1
  Top Layer w10: U2.8 281.02,957.6 228.43,905 R12.1 452.56,645 900,645 980,565 980,510 938.58,468.58 S5.3 ; 2645,145 2905,405 3050,405 3479.17,834.17 U3.30
  Top Layer w12: C11.1 163.86,468.58 S5.1 S5.3 S5.3@590.71,466.67 ; R27.1 777.38,280 S5.3@590.71,466.67 ; 2645,145 840,145 590.71,394.29 S5.3@590.71,466.67
SPI_CLK: D16.2 P5.2 U3.16 | length 1017.8
  Top Layer w12: P5.2 D16.2 2150.31,1224.69 2190,1185 2780,1185 2840,1245 U3.16
SPI_CSN: D17.2 P5.1 U3.17 | length 1032
  Top Layer w12: P5.1 D17.2 2150.31,1127.92 2186.23,1092 2737,1092 2842.76,1197.76 U3.17
SPI_MISO: D15.2 P5.3 U3.15 | length 988.4
  Top Layer w12: P5.3 D15.2 2150.31,1327.92 2186.23,1292 3001.22,1292 U3.15
SPI_MOSI: D14.2 P5.4 U3.14 | length 1017.7
  Top Layer w12: P5.4 D14.2 2150.31,1414.69 2185,1380 2855,1380 2895.51,1339.49 U3.14
SWCLK: D21.2 P4.4 U3.21 | length 2123.6
  Top Layer w8: P4.4 1459.88,510.12 1435,535 1435,650 1735,950 3015,950
  Top Layer w10: 3015,950 3053.98,988.98 U3.21
  Top Layer w12: P4.4 1515.12,510 D21.2
SWDIO: D22.2 P4.2 U3.22 | length 1878
  Top Layer w10: D22.2 1755.31,670.31 2010,925 3064.5,925 3101.22,961.72 U3.22
  Top Layer w12: P4.2 D22.2
SWO: D20.2 P4.6 U3.23 | length 2001.9
  Top Layer w8: 2075,885 3096.93,885
  Top Layer w10: D20.2@1795.31,460.12 1795.31,468.28 1890,562.97 1890,700 2075,885 ; 3096.93,885 3148.46,936.54 U3.23
  Top Layer w12: P4.6 1515.12,460 D20.2
SYSOFF: S1.2 U1.15 | length 916.1
  Top Layer w8: U1.15 665.16,2034.84 565,2135 565,2200 660,2295 875,2295 1013.43,2433.43 S1.2
USB_D+: P1.3 U4.15 | length 1933.7
  Top Layer w8: U4.15 U4.15@1392.28,2137.72
  Top Layer w10: P1.3 554.72,2545.28 540,2560 335,2560 305,2590 305,2645 335,2675 922.13,2675 942.13,2695 1230,2695 1318,2607 1318,2210.62 U4.15
USB_D-: P1.2 U4.16 | length 1372.3
  Top Layer w10: P1.2 585.03,2507.8 585.03,2548.35 819.28,2548.35 893.93,2623 1113,2623 1150,2660 1215,2660 1275,2600 1275,2180 1344.25,2110.75 U4.16
USB_UART_RX: P9.1 U3.19 | length 1802.5
  Top Layer w10: P9.1 1640,1065 1725,980 1960,980
  Top Layer w12: 1960,980 2760,980 2883.27,1103.27 U3.19
USB_UART_TX: P8.2 U3.18 | length 1608.9
  Top Layer w10: P8.2 1790,1095 1850,1035 1970,1035
  Top Layer w12: 1970,1035 2735,1035 2850.51,1150.51 U3.18
V_BATT: B1.1 C2.1 R10.2 TP1.1 U1.2 U1.3 | length 1740.3
  Top Layer w10: TP1.1 430,2320 835,2320 965,2450 965,2575 995,2605 1184.88,2605 R10.2 ; U1.3 594.96,1930.16 562.56,1962.56 560.12,1965 577.13,1965 592.28,1949.84 U1.2
  Top Layer w20: TP1.1 315,1978.11 B1.1 428.19,1974.37 C2.1 562.56,1962.56
V_RAW: P1.1 P2.1 R1.1 | length 849.2
  Top Layer w10: P1.1 730,2383.7 R1.1
  Top Layer w20: P2.1 R1.1@729.25,2370
V_USB: C1.2 R1.2 U1.13 U4.20 | length 2145.4
  Top Layer w10: U1.13 704.53,2029.53 ; 730,2055 705,2030 765,2030 C1.2 ; R1.2 795.75,2185 980,2185 1015,2150 1015,1655 1110,1560 1395,1560 1500,1665 1500,1940 1431.61,2008.39 U4.20
  Top Layer w20: 730,2055 R1.2
VCC: C13.1 D18.2 P4.1 P6.2 P6.20 P10.3 P10.4 R16.2 R17.2 R20.2 R21.2 S2.2 U3.29 | length 10090.7
  Top Layer w20: P10.3 P10.4 1205,1025 918.43,738.43 S2.2 ; P4.1 D18.2 1234.69,585.31 1127.52,692.48 ; P6.2 2585,2487.99 2585,2655 2550,2690 1823.95,2690 1785,2651.05 1785,2487.99 P6.20 1590.55,2437.99 C13.1 1582.56,2372.56 1525,2315 1525,915 1302.48,692.48 1127.52,692.48 ; R17.2 2607.56,407.56 2002.56,407.56 1950,355 ; R20.2 R21.2 2655,707.56 R16.2 2047.54,682.56 1950,585.02 1950,355 ; U3.29 3431.93,876.93 3005,450 2850,450 2640,240 1835,240 ; S2.2 1127.52,692.48 ; S2.2 1103.2,507.71 1103.2,226.8 1135,195 1790,195 1835,240 ; 1835,240 1950,355
VCC_IO: R25.2 R28.2 U4.4 | length 640.2
  Top Layer w10: R28.2 1565,1797.91 1647.52,1880.43 ; R25.2 1575,1935 1629.57,1880.43 1647.52,1880.43 ; U4.4@1673,1880.43 1647.52,1880.43
VREG: C3.2 C4.2 D1.1 D2.1 R6.2 R26.1 TP2.1 U1.11 U2.10 U2.11 U2.12 | length 1839.7
  Top Layer w10: U1.11 890.16,1949.84 C3.2@895,1945
  Top Layer w20: 328.34,1097.66 337.52,1106.84 ; U2.12 U2.11 337.52,1106.84 ; TP2.1 477.56,1590 R6.2 ; C3.2@895,1945 R26.1 850,1585 824.88,1559.88 D1.1 D2.1 612.56,1559.88 R6.2 ; 337.52,1106.84 414.02,1106.84 C4.2 530,1189.13 R6.2
VREGOUT: C6.2 C8.2 R12.2 S2.1 TP3.1 U2.4 U2.5 | length 1771.9
  Top Layer w10: U2.5 261.34,1166.97 U2.4 U2.4@262.71,1188.02
  Top Layer w20: C6.2 C8.2 223.43,1308.43 ; U2.4@257.71,1188.02 223.43,1222.31 223.43,1308.43 ; S2.1 853.43,600 325,600 TP3.1 137.44,787.56 R12.2 134.02,908.42 134.02,1219.02 223.43,1308.43
pads on no net: P1.4 P1.6 P1.7 P1.8 P1.9 P4.7 P4.8 P4.9 P6.3 P6.4 P6.6 P6.8 P6.9 P6.10 P6.11 P6.13 P6.15 P6.17 P6.18 P6.19 S1.None U3.24 U4.2 U4.3 U4.6 U4.8 U4.9 U4.10 U4.11 U4.12 U4.13 U4.14 U4.19 U4.24 U4.27 U4.28

## Polygon pours and split planes (outlines as drawn)
GND on Bottom Layer "bottom_gnd" (solid, remove dead copper, pour order 12): 20,2600 100,2700 2785,2700 2880,2605 2880,2255 2985,2150 3450,2150 3535,2065 3535,1415 3530,1410 3390,1410 3390,1130 3390,1095 3400,1085 3535,1085 3535,415 3505,350 2900,350 2900,100 2795,20 150,20 20,150
GND on Top Layer "top_gnd" (solid, remove dead copper, pour order 8): 20,2635 80,2695 80,2700 2785,2695 2885,2595 2885,2255 2980,2150 3455,2150 3540,2065 3540,1410 3395,1410 3395,1080 3540,1080 3540,420 3510,350 2965,345 2900,290 2900,95 2800,20 80,20 20,155

## Silkscreen, mask and mechanical layers (free items; w line width, h text height)
Top Overlay:
  drawing of 12 lines, arcs and shapes, not listed
  text "TX" at 2350,2275 h20
  text "+" at 2785,2275 h20
  text "+" at 2595,2210 h20
  text "+" at 2325,2195 h20
  text "RX" at 2110,2140 h20
  text "+" at 2035,2110 h20
  text "+" at 2185,2050 h20
  text "GPIO_0/PA2" at 2280,2020 h20
  text "+" at 1885,2015 h20
  text "ECEN 5023" at 2855,1975 h30
  text "+" at 2190,1950 h20
  text "+" at 1100,1945 h20
  text "GPIO_1/PA3" at 2280,1920 h20
  text "LOW POWER EMBD DESIGN" at 2850,1895 h30
  text "+" at 2190,1850 h20
  text "+" at 1140,1845 h20
  text "LEUART_RX/PA4" at 2280,1820 h20
  text "Aakash Ashish Smitesh" at 2850,1815 h30
  text "+" at 2185,1745 h20
  text "Gunj Preshit" at 2855,1725 h30
  text "LEUART_TX/PA5" at 2285,1720 h20
  text "+" at 2190,1655 h20
  text "I2C_SCL/PB11" at 2285,1625 h20
  text "+" at 2190,1550 h20
  text "I2C_SDA/PB13" at 2285,1525 h20
  text "+" at 660,1510 h20
  text "+" at 780,1510 h20
  text "+" at 2205,1450 h20
  text "SPI_MOSI/PC6" at 2280,1420 h20
  text "+" at 905,1405 h20
  text "+" at 2200,1350 h20
  text "SPI_MISO/PC7" at 2285,1320 h20
  text "GND" at 1365,1315 h20
  text "+" at 2200,1250 h20
  text "SPI_CLK/PC8" at 2285,1220 h20
  text "GND" at 1365,1215 h20
  text "+" at 2200,1155 h20
  text "SPI_CS/PC9" at 2285,1120 h20
  text "VCC" at 1365,1110 h20
  text "VCC" at 1365,1010 h20
  text "+" at 2830,860 h20
  text "+" at 2835,740 h20
  text "+" at 1245,590 h20
  text "+" at 1790,525 h20
  text "+" at 1855,460 h20
  text "+" at 1820,335 h20
  text "ENERGY AUDITOR" at 3035,135 h30
  text "GATEWAY" at 3145,50 h30
Outline:
  lines w10: 0,0 3560,0 3560,758.75 3560,1846.25 3560,2715 0,2715 0,0
Drill Drawing:
  circle w10: c275.62,4520.83 r33.33
  lines w10: 242.29,4204.17 258.96,4204.17 275.62,4187.5 292.29,4204.17 308.96,4204.17 292.29,4220.83 308.96,4237.5 292.29,4237.5 275.62,4254.17 258.96,4237.5 242.29,4237.5 258.96,4220.83 242.29,4204.17 ; 242.29,4337.5 308.96,4337.5 308.96,4404.17 242.29,4404.17 242.29,4337.5 ; 242.29,4704.17 308.96,4704.17 275.62,4637.5 242.29,4704.17
  lines w15: 182.5,4142.5 8048.37,4142.5 ; 182.5,4742.5 8048.37,4742.5 ; 733.38,3992.5 733.38,4892.5 ; 1313.22,3992.5 1313.22,4892.5 ; 2412.9,3992.5 2412.9,4892.5 ; 2918.78,3992.5 2918.78,4892.5 ; 3652.58,3992.5 3652.58,4892.5 ; 5152.13,3992.5 5152.13,4892.5 ; 5741.98,3992.5 5741.98,4892.5 ; 6487.78,3992.5 6487.78,4892.5 ; 7137.61,3992.5 7137.61,4892.5 ; 182.5,3992.5 8048.37,3992.5 8048.37,4892.5 182.5,4892.5 182.5,3992.5
  text "Symbol" at 272.5,4787.5 h72
  text "Count" at 778.38,4787.5 h72
  text "Hole Size" at 1358.22,4787.5 h72
  text "Plated" at 2457.9,4787.5 h72
  text "Hole Type" at 2963.78,4787.5 h72
  text "Drill Layer Pair" at 3697.58,4787.5 h72
  text "Via/Pad" at 5197.13,4787.5 h72
  text "Pad Shape" at 5786.98,4787.5 h72
  text "Template" at 6532.78,4787.5 h72
  text "Hole Length" at 7182.61,4787.5 h72
  text "2" at 778.38,4637.5 h60
  text "33.47mil (0.850mm)" at 1358.22,4637.5 h60
  text "NPTH" at 2457.9,4637.5 h60
  text "Round" at 2963.78,4637.5 h60
  text "Top Layer - Bottom Layer" at 3697.58,4637.5 h60
  text "Pad" at 5197.13,4637.5 h60
  text "Rounded" at 5786.98,4637.5 h60
  text "c85hn85" at 6532.78,4637.5 h60
  text "-" at 7182.61,4637.5 h60
  text "2" at 778.38,4487.5 h60
  text "55.12mil (1.400mm)" at 1358.22,4487.5 h60
  text "PTH" at 2457.9,4487.5 h60
  text "Round" at 2963.78,4487.5 h60
  text "Top Layer - Bottom Layer" at 3697.58,4487.5 h60
  text "Pad" at 5197.13,4487.5 h60
  text "Rounded" at 5786.98,4487.5 h60
  text "c210h140" at 6532.78,4487.5 h60
  text "-" at 7182.61,4487.5 h60
  text "30" at 778.38,4337.5 h60
  text "35.43mil (0.900mm)" at 1358.22,4337.5 h60
  text "PTH" at 2457.9,4337.5 h60
  text "Round" at 2963.78,4337.5 h60
  text "Top Layer - Bottom Layer" at 3697.58,4337.5 h60
  text "Pad" at 5197.13,4337.5 h60
  text "(Mixed)" at 5786.98,4337.5 h60
  text "(Mixed)" at 6532.78,4337.5 h60
  text "-" at 7182.61,4337.5 h60
  text "83" at 778.38,4187.5 h60
  text "12.00mil (0.305mm)" at 1358.22,4187.5 h60
  text "PTH" at 2457.9,4187.5 h60
  text "Round" at 2963.78,4187.5 h60
  text "Top Layer - Bottom Layer" at 3697.58,4187.5 h60
  text "Via" at 5197.13,4187.5 h60
  text "Rounded" at 5786.98,4187.5 h60
  text "v61h30m0" at 6532.78,4187.5 h60
  text "-" at 7182.61,4187.5 h60
  text "117 Total" at 778.38,4037.5 h60

## Dimensions
0,2715 to 0,0 on Mechanical 4
3560,2715 to 0,2715 on Mechanical 4
3560,2715 to 3620,1480 on Mechanical 4
3560,0 to 3526.42,1022.56 on Mechanical 4
3526.42,1467.44 to 3585,2150 on Mechanical 4
3526.42,1022.56 to 3595,350 on Mechanical 4

## Text inside footprints (layer, text, board x,y; h text height)
P4: Top Overlay "1" at 1312.95,658.54 h20 r270; Top Overlay "2" at 1487.21,658.33 h20 r270; Top Overlay "9" at 1313.1,293.46 h20 r270; Top Overlay "10" at 1487.18,293.51 h20 r270
P6: Top Overlay "19" at 1647.52,2572.46 h20 r180; Top Overlay "1" at 2735,2660 h20 r180; Top Overlay "2" at 2735,2445 h20 r180; Top Overlay "20" at 1648.46,2422.8 h20 r180
S3: Mechanical 1 "2" at 2483.2,819.14 h73.82 r180; Mechanical 1 "3" at 2317.73,661.57 h73.82 r180; Mechanical 1 "4" at 2323.86,817.07 h73.82 r180; Mechanical 1 "1" at 2491.19,665.51 h73.82 r180
S4: Mechanical 1 "2" at 2478.2,504.14 h73.82 r180; Mechanical 1 "3" at 2312.73,346.57 h73.82 r180; Mechanical 1 "4" at 2318.86,502.07 h73.82 r180; Mechanical 1 "1" at 2486.19,350.51 h73.82 r180
S5: Mechanical 1 "2" at 346.01,275.86 h73.82; Mechanical 1 "3" at 511.48,433.43 h73.82; Mechanical 1 "4" at 505.36,277.93 h73.82; Mechanical 1 "1" at 338.02,429.49 h73.82